# EAGLE board DMB-4771-Relais-C (EAGLE 6.5.0)
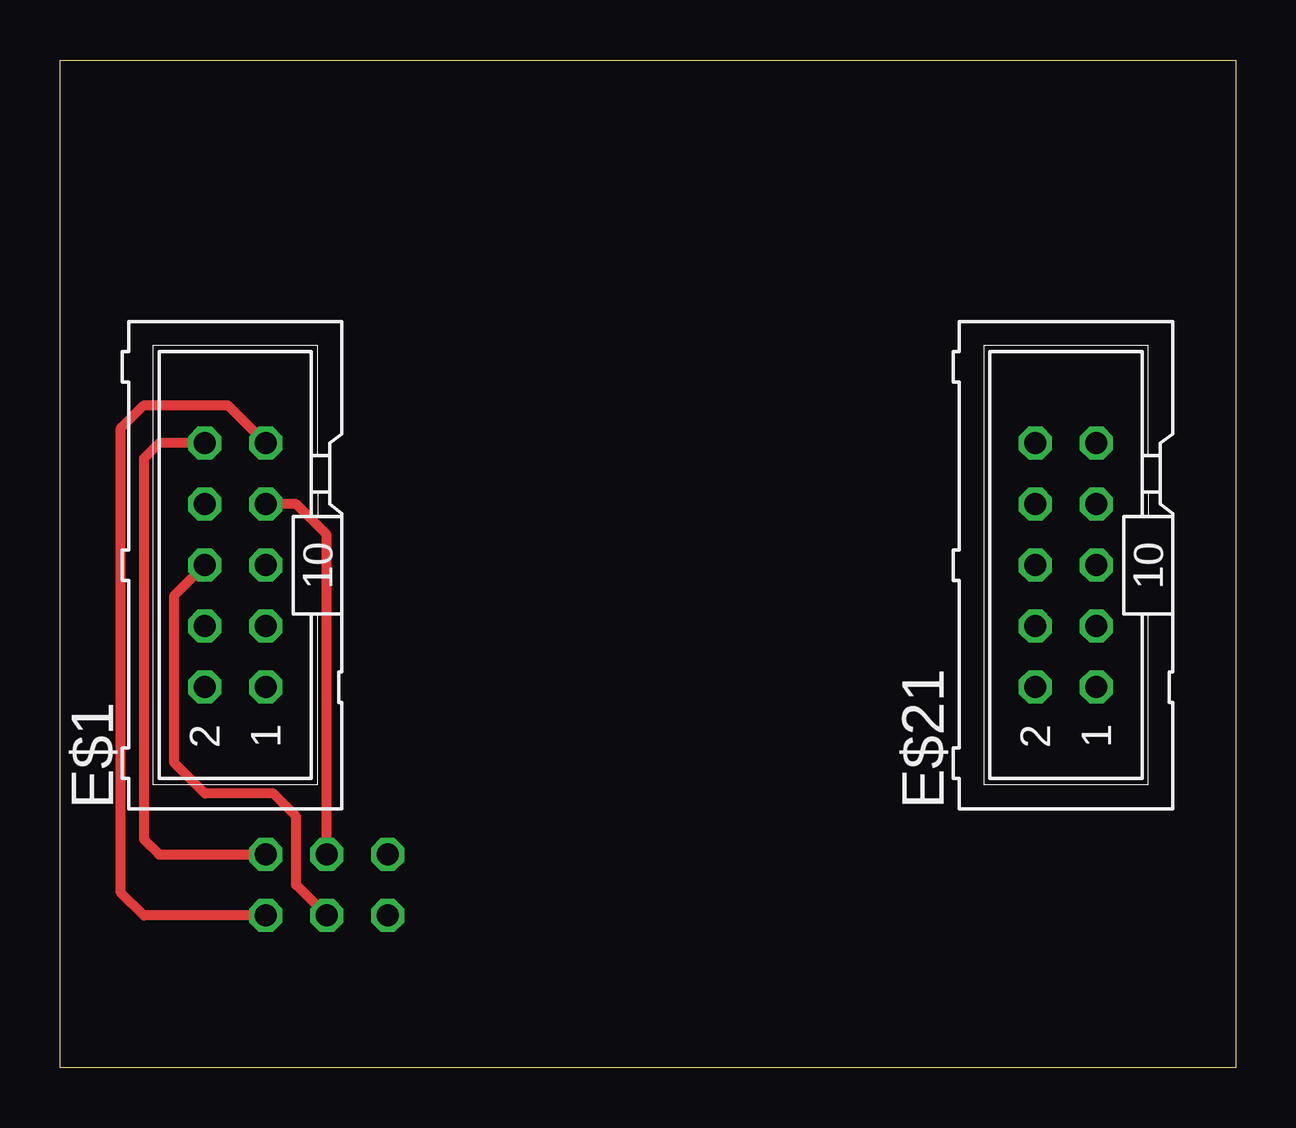
[diagram p0: board, top side]
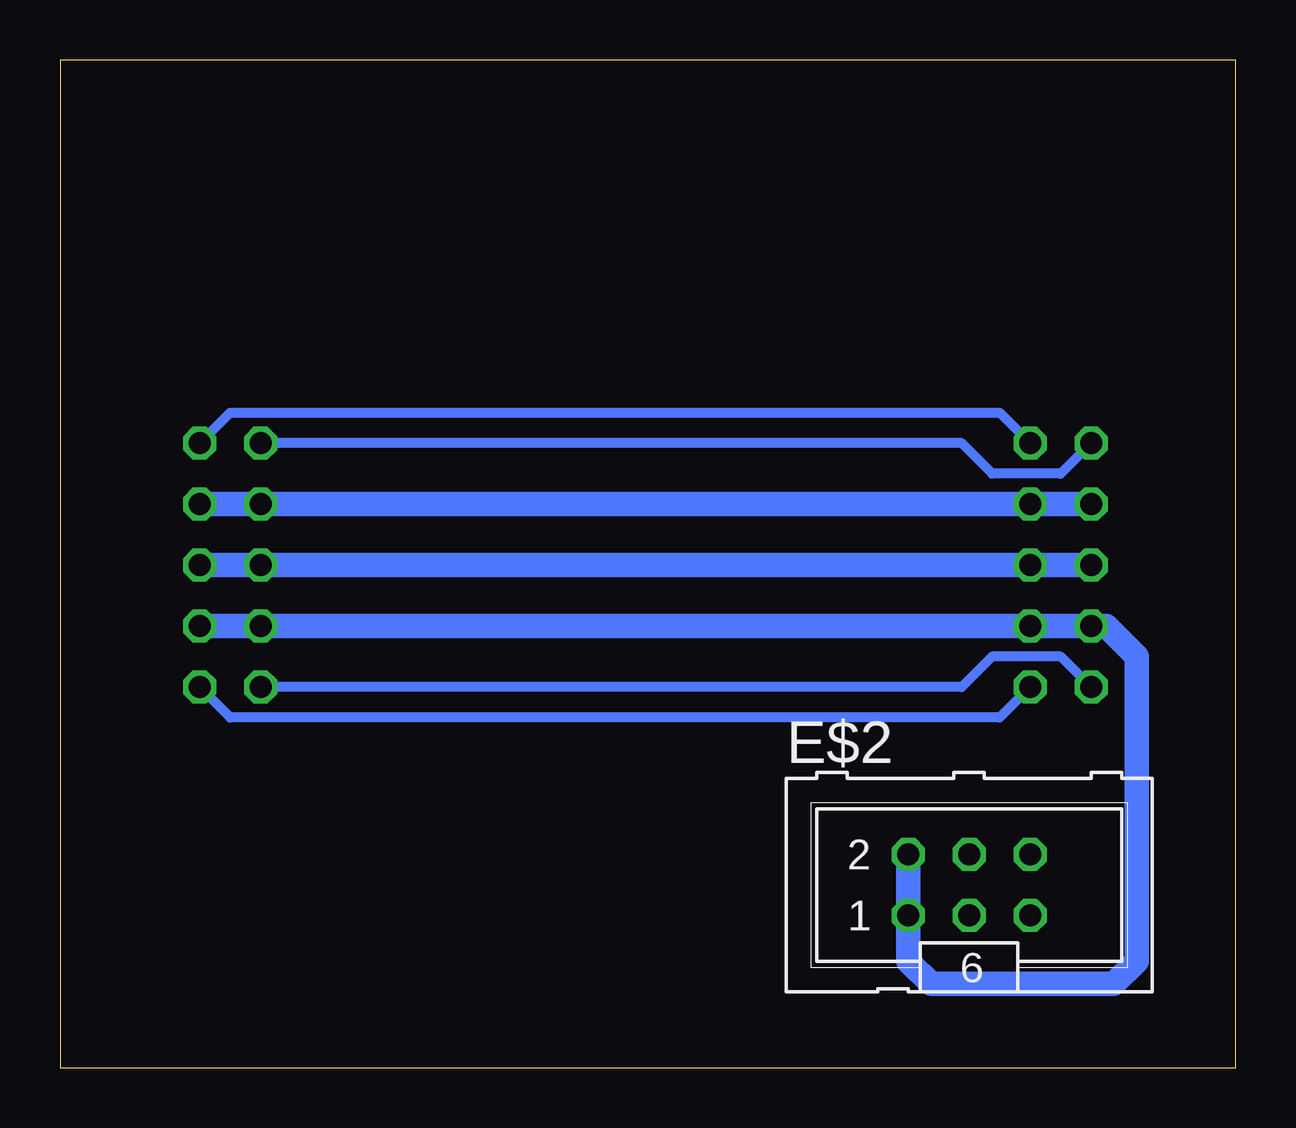
[diagram p1: board, bottom side, seen from below]

Size 49 x 42.01 mm. Coordinates in mm from the lower left corner, seen from the top.
Outline: 0,42.01 49,42.01 49,0 0,0 0,42.01
Copper layers (1*16): Top 0.0356mm / dielectric 1.5011mm / Bottom 0.0356mm
Design rules "LaenPCBOrder": minimum track width 6mil, minimum drill 13mil, track to track 6mil, track to pad 6mil, pad to pad 6mil, via to via 6mil, smd to smd 6mil, copper to edge 15mil, drill to drill 6mil, minimum pad ring 7mil, minimum via ring 7mil, stop-mask expansion 3mil, vias tented up to drill 0mil, thermal gap 10mil

## Footprints (pad centres in the part's own frame; a part is rotated, then mirrored left to right if it is on the bottom)
ML10 = drill 0.914 octagon: 1 -5.08,-1.27; 2 -5.08,1.27; 3 -2.54,-1.27; 4 -2.54,1.27; 5 0,-1.27; 6 0,1.27; 7 2.54,-1.27; 8 2.54,1.27; 9 5.08,-1.27; 10 5.08,1.27
ML6 = drill 0.914 octagon: 1 -2.54,-1.27; 2 -2.54,1.27; 3 0,-1.27; 4 0,1.27; 5 2.54,-1.27; 6 2.54,1.27

## Placement (x,y rotation side)
E$1  [ML10]  7.3,20.95 90 top
E$2  [ML6]  11.11,7.62 0 bottom
E$21  [ML10]  41.91,20.95 90 top

## Library data of the parts
E$1 E$2 E$21 = con-harting-ml

## Nets
3V3: E$1.7 E$1.8 E$2.4 E$21.7 E$21.8
GND: E$1.5 E$1.6 E$2.3 E$21.5 E$21.6
S$27: E$1.3 E$1.4 E$2.1 E$2.2 E$21.3 E$21.4
S$90: E$1.2 E$21.2
S$91: E$1.1 E$21.1
SCL: E$1.10 E$2.6 E$21.10
SDA: E$1.9 E$2.5 E$21.9

## Tracks (layer width: path | path; a pad name or v marks a point on that pad's centre or on a via)
3V3
  Top 0.406: E$2.4 11.11,22.23 9.84,23.5 E$1.7
  Bottom 1.016: E$21.7 E$21.8 E$1.7 E$1.8
GND
  Top 0.406: E$2.3 9.84,7.62 9.84,10.48 8.89,11.43 6.03,11.43 4.76,12.7 4.76,19.68 E$1.6
  Bottom 1.016: E$21.5 E$21.6 E$1.5 E$1.6
S$27
  Bottom 1.016: E$21.3 E$21.4 E$1.3 E$1.4 5.4,18.41 4.13,17.14 4.13,4.45 5.08,3.49 12.7,3.49 13.65,4.45 E$2.2 E$2.1
S$90
  Bottom 0.406: E$21.2 11.43,15.88 10.16,17.14 7.3,17.14 E$1.2
S$91
  Bottom 0.406: E$21.1 41.91,14.61 9.84,14.61 E$1.1
SCL
  Top 0.406: E$1.10 4.13,26.04 3.49,25.4 3.49,9.53 4.13,8.89 E$2.6
  Bottom 0.406: E$21.10 11.43,26.04 10.16,24.77 7.3,24.77 E$1.10
SDA
  Top 0.406: E$2.5 3.49,6.35 2.54,7.3 2.54,26.67 3.49,27.62 6.99,27.62 E$1.9
  Bottom 0.406: E$21.9 41.91,27.3 9.84,27.3 E$1.9

## Text on the board
tDocu: Inputs | RTD1 | RTD2 | RTD3 | RTD4 | 1 | 2 | 3 | 4 | 5 | 6 | 7 | 8 | GND | PWM1 | PWM2 | PWM3 | PWM4 | POWER | 1 | 2 | 3 | 4 | 5 | 6 | 7 | 8